# EAGLE board OSPID (EAGLE 6.4)

Size 101.6 x 81.28 mm. Coordinates in mm from the lower left corner, seen from the top.
Outline: 0,0 101.6,0 101.6,81.28 0,81.28 0,0
Copper layers (1*16): Top 0.035mm / dielectric 1.5mm / Bottom 0.035mm
Design rules "default *": minimum track width 10mil, minimum drill 24mil, track to track 16mil, track to pad 8mil, pad to pad 16mil, via to via 8mil, smd to smd 8mil, copper to edge 25mil, drill to drill 16mil, minimum pad ring 10mil, minimum via ring 8mil, stop-mask expansion 4mil, vias tented up to drill 0mil, thermal gap 16mil
Net classes: 1 power: width 1.016 mm, clearance 0.305 mm

## Footprints (pad centres in the part's own frame; a part is rotated, then mirrored left to right if it is on the bottom)
AK500/3 = drill 1.321 long: 1 -5.004,0; 2 0,0; 3 5.004,0
DIODEBRIDGE = drill 0.8: + -2.54,2.54; - 2.54,-2.54; AC1 2.54,2.54; AC2 -2.54,-2.54
CPOL-RADIAL-100UF-25V = drill 0.7 pad 1.651 square: 1 1.27,0 | drill 0.7 pad 1.651: 2 -1.27,0
CAP-PTH-SMALL = drill 0.7 pad 1.651: 1 0,0; 2 2.54,0
CPOL-RADIAL-10UF-25V = drill 0.7 pad 1.651 square: 1 1.27,0 | drill 0.7 pad 1.651: 2 -1.27,0
DO41-10 = drill 1.118 pad 1.93: A 5.08,0; C -5.08,0
DIODE-1N4001 = drill 1 pad 1.981: A -5.08,0; C 5.08,0
6PINHEADER = drill 1 octagon: P$1 -6.35,0; P$2 -3.81,0; P$3 -1.27,0; P$4 1.27,0; P$5 3.81,0; P$6 6.35,0
3,6-PAD = drill 3.6 pad 5.842: B3,6 0,0
DIL16 = drill 0.813 long: 1 -8.89,-3.81; 2 -6.35,-3.81; 3 -3.81,-3.81; 4 -1.27,-3.81; 5 1.27,-3.81; 6 3.81,-3.81; 7 6.35,-3.81; 8 8.89,-3.81; 9 8.89,3.81; 10 6.35,3.81; 11 3.81,3.81; 12 1.27,3.81; 13 -1.27,3.81; 14 -3.81,3.81; 15 -6.35,3.81; 16 -8.89,3.81
TO-220-ALT = drill 1.016 long: GND 0,-3.81; IN -2.54,-3.81; OUT 2.54,-3.81 | hole 3.302: 0,11.176
POWER_JACK_PTH_LOCK = drill 2.997 pad 4.115: GND 0.025,6.557; GNDBREAK 3.762,10.7 | drill 3.2 pad 4.115: PWR 0,13.878
2X3_POGO = drill 1.2 pad 1.829 octagon: P$1 0,0; P$2 0,2.54; P$3 2.54,0; P$4 2.54,2.54; P$5 5.08,0; P$6 5.08,2.54
1X02_LOCK = drill 1.016 pad 1.88: 1 -0.178,0; 2 2.718,0
1X03_LOCK = drill 1.016 pad 1.88: 1 0,0.127; 2 2.54,-0.127; 3 5.08,0.127
1X05_LOCK = drill 1.016 pad 1.88: 1 0,0.127; 2 2.54,-0.127; 3 5.08,0.127; 4 7.62,-0.127; 5 10.16,0.127
LED5MM = drill 0.813 pad 1.88: A -1.27,0; K 1.27,0
LED5MM' = drill 0.813 pad 1.676 octagon: A -1.27,0; K 1.27,0
AK500/2 = drill 1.321 long: 1 -2.515,0; 2 2.515,0
AK500/4 = drill 1.321 long: 1 -7.518,0; 2 -2.489,0; 3 2.489,0; 4 7.518,0
AXIAL-0.4 = drill 0.9 pad 1.88: P$1 -5.08,0; P$2 5.08,0
1/6W-RES = drill 0.762: 1 -2.5,0; 2 2.5,0
AXIAL-0.3 = drill 0.9 pad 1.88: P$1 -3.81,0; P$2 3.81,0
SQM_5-10 = drill 1.016 square: P1 -2.54,0; P2 2.54,0
TACTILE-PTH = drill 1.016 pad 1.88: 1 -3.251,2.261; 2 3.251,2.261; 3 -3.251,-2.261; 4 3.251,-2.261
TRIAC = drill 1.1: 1 -2.54,0; 2 0,0; 3 2.54,0
DIL28-3 = drill 0.813 long: 1 -16.51,-3.81; 2 -13.97,-3.81; 3 -11.43,-3.81; 4 -8.89,-3.81; 5 -6.35,-3.81; 6 -3.81,-3.81; 7 -1.27,-3.81; 8 1.27,-3.81; 9 3.81,-3.81; 10 6.35,-3.81; 11 8.89,-3.81; 12 11.43,-3.81; 13 13.97,-3.81; 14 16.51,-3.81; 15 16.51,3.81; 16 13.97,3.81; 17 11.43,3.81; 18 8.89,3.81; 19 6.35,3.81; 20 3.81,3.81; 21 1.27,3.81; 22 -1.27,3.81; 23 -3.81,3.81; 24 -6.35,3.81; 25 -8.89,3.81; 26 -11.43,3.81; 27 -13.97,3.81; 28 -16.51,3.81
LCD-16X2_NOHOLES = drill 1.016 pad 1.88 square: 1 -32,15.5 | drill 1.016 pad 1.88: 2 -29.46,15.5; 3 -26.92,15.5; 4 -24.38,15.5; 5 -21.84,15.5; 6 -19.3,15.5; 7 -16.76,15.5; 8 -14.22,15.5; 9 -11.68,15.5; 10 -9.14,15.5; 11 -6.6,15.5; 12 -4.06,15.5; 13 -1.52,15.5; 14 1.02,15.5; 15 3.56,15.5; 16 6.1,15.5
DIL06 = drill 0.813 offset: 1 -2.54,-3.81; 2 0,-3.81; 3 2.54,-3.81; 4 2.54,3.81; 5 0,3.81; 6 -2.54,3.81
DO35-10 = drill 0.813 long: A 5.08,0; C -5.08,0
DIL04 = drill 0.813 offset: 1 -1.27,-3.81; 2 1.27,-3.81; 3 1.27,3.81; 4 -1.27,3.81
TRIM_POT = drill 1 pad 1.88: 1 5.08,0; 2 0,2.54; 3 0,-2.54
HC49U-V = drill 0.813: 1 -2.413,0; 2 2.413,0

## Placement (x,y rotation side)
AUTO-MAN  [AK500/3]  98.74,37.47 90 top
BR41  2W01G  [DIODEBRIDGE]  82.23,56.52 180 top
C1  47uF  [CPOL-RADIAL-100UF-25V]  15.56,19.68 0 top
C2  47uF  [CPOL-RADIAL-100UF-25V]  15.56,12.38 0 top
C3  0.1uF  [CAP-PTH-SMALL]  8.89,60.01 180 top
C4  0.1uF  [CAP-PTH-SMALL]  27.3,28.57 0 top
C5  0.1uF  [CAP-PTH-SMALL]  31.75,36.2 0 top
C6  22pF  [CAP-PTH-SMALL]  37.78,22.86 180 top
C7  22pF  [CAP-PTH-SMALL]  30.16,22.86 180 top
C8  0.1uF  [CAP-PTH-SMALL]  31.75,40.32 0 top
C9  0.1uF  [CAP-PTH-SMALL]  31.75,32.07 0 top
C11  0.22uF  [CAP-PTH-SMALL]  64.77,75.25 0 top
C21  47uF  [CPOL-RADIAL-10UF-25V]  80.01,27.62 270 top
C22  47uF  [CPOL-RADIAL-10UF-25V]  73.66,23.81 270 top
D1  1N4004  [DO41-10]  7.3,50.48 90 top
D2  [DIODE-1N4001]  32.38,32.07 0 top
D3  [DIODE-1N4001]  59.05,43.81 0 top
FTDI  FTDI  [6PINHEADER]  2.86,53.66 90 top
H5  MOUNT-PAD-ROUND3.6  [3,6-PAD]  5.08,76.2 0 top
H6  MOUNT-PAD-ROUND3.6  [3,6-PAD]  96.52,76.2 0 top
H7  MOUNT-PAD-ROUND3.6  [3,6-PAD]  96.52,5.08 0 top
H8  MOUNT-PAD-ROUND3.6  [3,6-PAD]  5.08,5.08 0 top
IC1  74LS595N  [DIL16]  21.27,55.88 0 top
IC2  [TO-220-ALT]  21.59,29.21 0 top
J1  POWER_JACKPTH_LOCK  [POWER_JACK_PTH_LOCK]  -3.17,16.19 270 top
JP1  [2X3_POGO]  47.94,20.64 0 top
JP2  [1X02_LOCK]  85.72,43.81 0 top
JP3  [1X03_LOCK]  82.55,38.42 0 top
JP4  [1X03_LOCK]  82.55,33.34 0 top
JP5  [1X05_LOCK]  -2.22,-40.96 0 top  (outside the outline)
LED1  [LED5MM]  33.97,9.21 0 top
LED2  [LED5MM']  84.45,5.4 0 top
M3-IN  [AK500/2]  98.74,24.77 90 top
MAINS1  [AK500/4]  98.74,61.59 90 top
R1  4.7k  [AXIAL-0.4]  71.75,34.29 90 top
R2  330  [1/6W-RES]  79.69,19.68 180 top
R3  2.2k  [1/6W-RES]  64.77,33.97 90 top
R4  10k  [AXIAL-0.4]  60.96,33.97 270 top
R5  10K  [AXIAL-0.3]  57.15,9.84 90 top
R6  1M  [AXIAL-0.3]  32.7,25.4 0 top
R7  0  [AXIAL-0.3]  38.73,64.45 180 top
R11  100  [1/6W-RES]  41.27,78.11 180 top
R12  390  [1/6W-RES]  62.23,78.11 0 top
R13  39  [1/6W-RES]  69.85,78.11 180 top
R17  470  [SQM_5-10]  62.87,57.78 90 top
R18  47K  [SQM_5-10]  73.03,57.78 90 top
R21  22k  [1/6W-RES]  71.12,13.97 0 top
R22  22k  [1/6W-RES]  79.06,13.97 0 top
R43  15k  [1/6W-RES]  43.18,53.98 180 top
S1  [TACTILE-PTH]  79.38,46.04 0 top
SENSOR  [AK500/3]  68.26,2.86 0 top
SPINDLE  [AK500/2]  98.74,14.61 90 top
U1  BT139  [TRIAC]  80.01,76.83 180 top
U2  ATMEGA328P_PDIP  [DIL28-3]  37.47,9.84 180 top
U3  LCD-16X2NOHOLES  [LCD-16X2_NOHOLES]  36.2,-19.05 0 top  (outside the outline)
U11  MOC3022M  [DIL06]  51.44,75.56 270 top
U12  DB3  [DO35-10]  66.04,70.8 180 top
U41  PC817  [DIL04]  51.44,57.78 90 top
U$1  [TRIM_POT]  17.46,75.88 180 top
Y1  16MHz  [HC49U-V]  32.7,18.41 0 top

## Library data of the parts
AUTO-MAN M3-IN MAINS1 SENSOR SPINDLE = con-ptr500; OC_FARNELL: unknown; OC_NEWARK: unknown
BR41 FTDI U1 = connectors
C1 C2 C4-C9 = SparkFun-Capacitors
C3 C11 C21 C22 R1-R4 R11-R13 R21 R22 R43 = SparkFun
D1 LED2 = adafruit2012
D2 D3 = SparkFun-DiscreteSemi
H5-H8 = holes
IC1 U2 = SparkFun-DigitalIC
IC2 = SparkFun-PowerIC
J1 JP2-JP5 = SparkFun-Connectors
JP1 = SparkFun-Connectors; PROD_ID: HW-11044
LED1 = SparkFun-LED
R5-R7 R17 R18 = SparkFun-Resistors
S1 U$1 = SparkFun-Electromechanical
U3 = SparkFun-Displays
U11 = optocoupler; MF: FAIRCHILD SEMICONDUCTOR; MPN: MOC3022-M; OC_FARNELL: 1021086; OC_NEWARK: 58K1956
U12 = diode
U41 = optocoupler; MPN: PC817X4J000F; OC_FARNELL: 9707727; OC_NEWARK: 97K7059
Y1 = SparkFun-FreqCtrl

## Nets
!RESET: C3.1 R4.P$2
BUTTONS: JP3.2
CS1: JP5.4 U2.6
D8: U2.14
D9: U2.15
D10: U2.16
DTR: C3.2 FTDI.P$6
GND: C1.2 C2.2 C4.2 C5.2 C6.1 C7.2 C8.1 C9.2 C21.2 C22.2 FTDI.P$1 FTDI.P$2 H5.B3,6 H6.B3,6 H7.B3,6 H8.B3,6 IC1.8 IC1.13 IC2.GND J1.GND J1.GNDBREAK JP1.P$6 JP3.3 JP4.3 JP5.5 LED2.K M3-IN.2 S1.3 S1.4 SENSOR.2 SPINDLE.2 U2.8 U2.22 U3.1 U3.5 U3.16 U11.2 U41.3 U$1.3
LCD_CLK: IC1.12
MACH3: AUTO-MAN.1 C22.1 R22.2
MACH3_PWM: M3-IN.1 R21.1
MAINS_LIVE: BR41.AC1 C11.1 MAINS1.1 R12.2 U1.2
MANUAL: AUTO-MAN.3 JP4.2
MISO: JP1.P$1 U2.18
MOSI: IC1.14 JP1.P$4 JP5.2 U2.17
MOTOR_LIVE: MAINS1.4 R13.1 U1.3
N$1: U1.1 U12.C
N$2: C21.1 R21.2 R22.1
N$3: U11.4 U12.A
N$4: LED2.A R2.2
N$5: C11.2 R13.2
N$6: R17.P1 R18.P2 U41.1
N$7: BR41.- LED1.K U41.2
N$8: LED1.A R18.P1
N$10: JP4.1 R3.1
N$11: U3.3 U$1.1
N$12: R1.P$1 SPINDLE.1
N$13: R11.1 U11.1
N$14: IC1.1 U3.4
N$15: R12.1 U11.6
N$16: IC1.2 U3.6
N$17: IC1.3 U3.11
N$18: IC1.4 U3.12
N$19: D3.A R5.P$2 S1.1 S1.2 U2.1
N$20: C7.1 R6.P$1 U2.10 Y1.1
N$21: R7.P$2 U3.15
N$22: C6.2 R6.P$2 U2.9 Y1.2
N$23: IC1.5 U3.13
N$24: IC1.6 U3.14
N$25: C2.1 D2.C IC2.IN
N$26: D2.A J1.PWR
N$27: D1.C JP2.2
N$28: C8.2 U2.21
N$29: BR41.+ R17.P2
NEUTRAL: BR41.AC2 MAINS1.2 MAINS1.3
RESET: JP1.P$5
RX: FTDI.P$4 U2.2
SCK: IC1.11 JP1.P$3 JP5.3 U2.19
SENSOR: SENSOR.1 U2.24
SPEED: AUTO-MAN.2 U2.23
SPINDLE-ON: R1.P$2 U2.27
TRIAC: R11.2 U2.26
TX: FTDI.P$5 U2.3
VCC: C1.1 C4.1 C5.1 C9.1 D3.C IC1.10 IC1.16 IC2.OUT JP1.P$2 JP2.1 JP3.1 JP5.1 R2.1 R3.2 R4.P$1 R5.P$1 R7.P$1 R43.2 SENSOR.3 U2.7 U2.20 U3.2 U$1.2
VIN: D1.A FTDI.P$3
ZEROCROSS: R43.1 U2.4 U41.4

## Tracks (layer width: path | path; a pad name or v marks a point on that pad's centre or on a via)
!RESET  (1 unrouted)
CS1  (1 unrouted)
DTR  (1 unrouted)
GND  (38 unrouted)
MACH3  (2 unrouted)
MACH3_PWM  (1 unrouted)
MAINS_LIVE  (4 unrouted)
MANUAL  (1 unrouted)
MISO  (1 unrouted)
MOSI  (3 unrouted)
MOTOR_LIVE  (2 unrouted)
N$1  (1 unrouted)
N$2  (2 unrouted)
N$3  (1 unrouted)
N$4  (1 unrouted)
N$5  (1 unrouted)
N$6  (2 unrouted)
N$7  (2 unrouted)
N$8  (1 unrouted)
N$10  (1 unrouted)
N$11  (1 unrouted)
N$12  (1 unrouted)
N$13  (1 unrouted)
N$14  (1 unrouted)
N$15  (1 unrouted)
N$16  (1 unrouted)
N$17  (1 unrouted)
N$18  (1 unrouted)
N$19  (4 unrouted)
N$20  (3 unrouted)
N$21  (1 unrouted)
N$22  (3 unrouted)
N$23  (1 unrouted)
N$24  (1 unrouted)
N$25  (2 unrouted)
N$26  (1 unrouted)
N$27  (1 unrouted)
N$28  (1 unrouted)
N$29  (1 unrouted)
NEUTRAL  (2 unrouted)
RX  (1 unrouted)
SCK  (3 unrouted)
SENSOR  (1 unrouted)
SPEED  (1 unrouted)
SPINDLE-ON  (1 unrouted)
TRIAC  (1 unrouted)
TX  (1 unrouted)
VCC  (22 unrouted)
VIN  (1 unrouted)
ZEROCROSS  (2 unrouted)

## Text on the board
tPlace: BEWARE!!!! / MAINS VOLTAGE!!! | N L / Motor | L N / 120v